# Altium PCB tach key H-4key.PcbDoc
Units mm, origin at the board's own origin, x right, y up, seen from the top; angles counter-clockwise.
Board outline 264.23 x 97.21 mm, 2 copper layers (Top Layer, Bottom Layer); 83 components, 54 nets, 236 pads, 0 vias.
Unrouted connection lines stored in the file: 8.
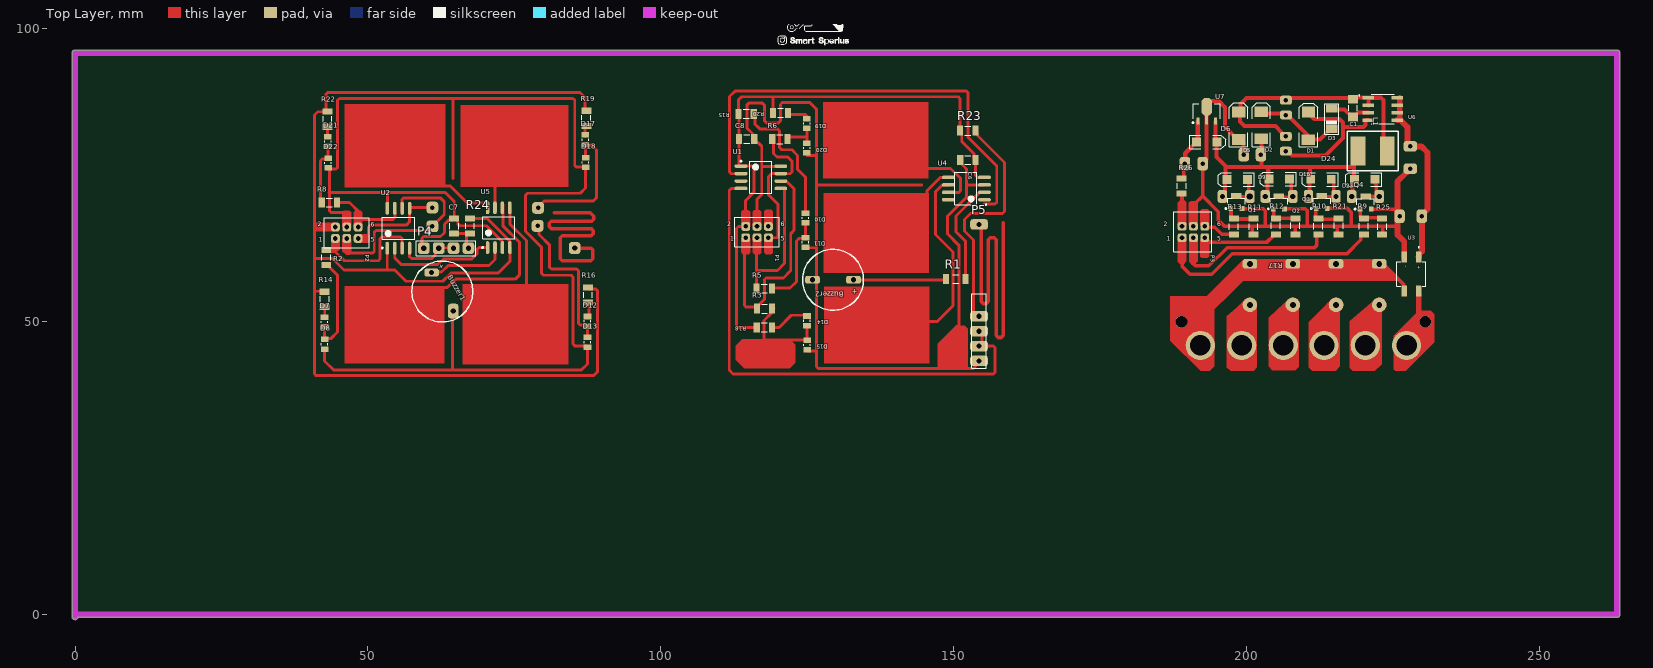
[diagram p0: Top Layer view]
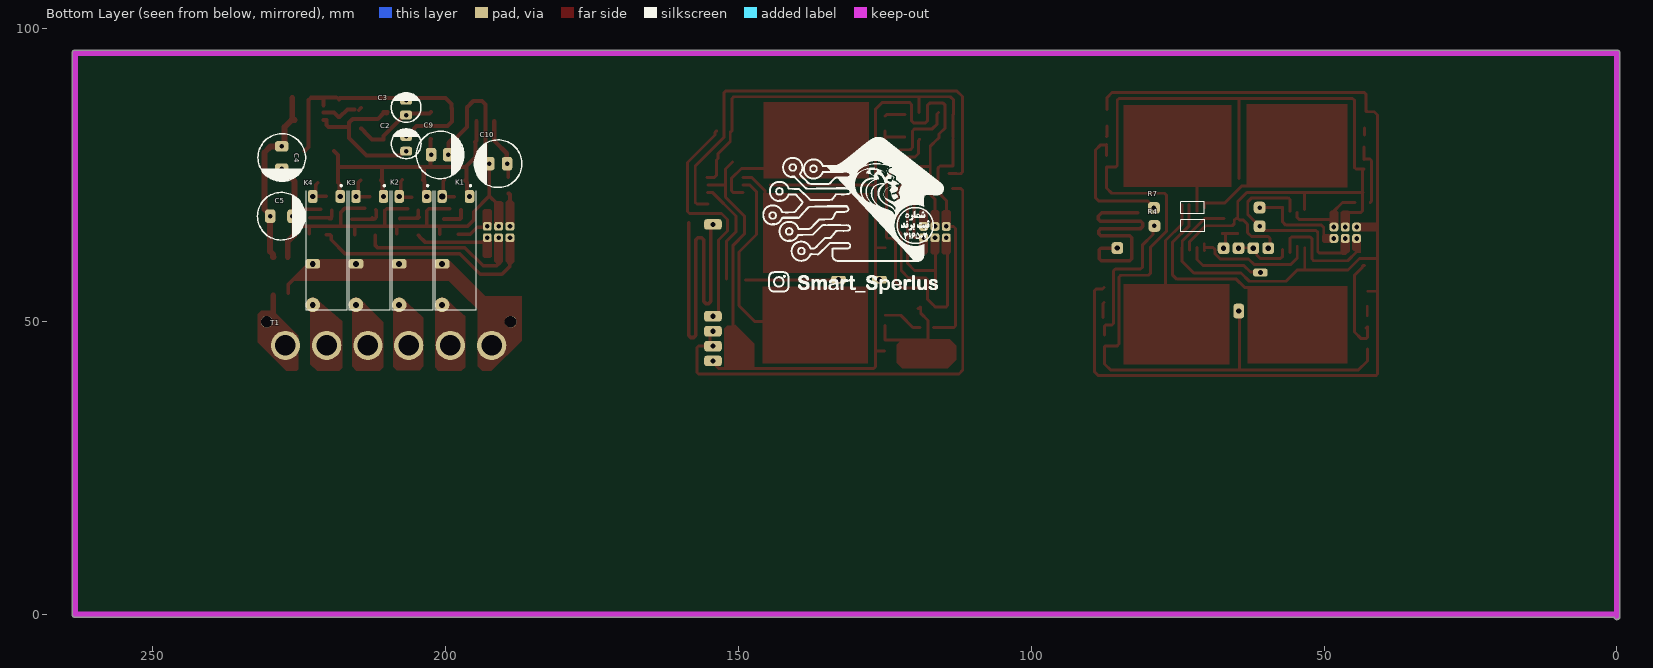
[diagram p1: Bottom Layer view, seen from below]
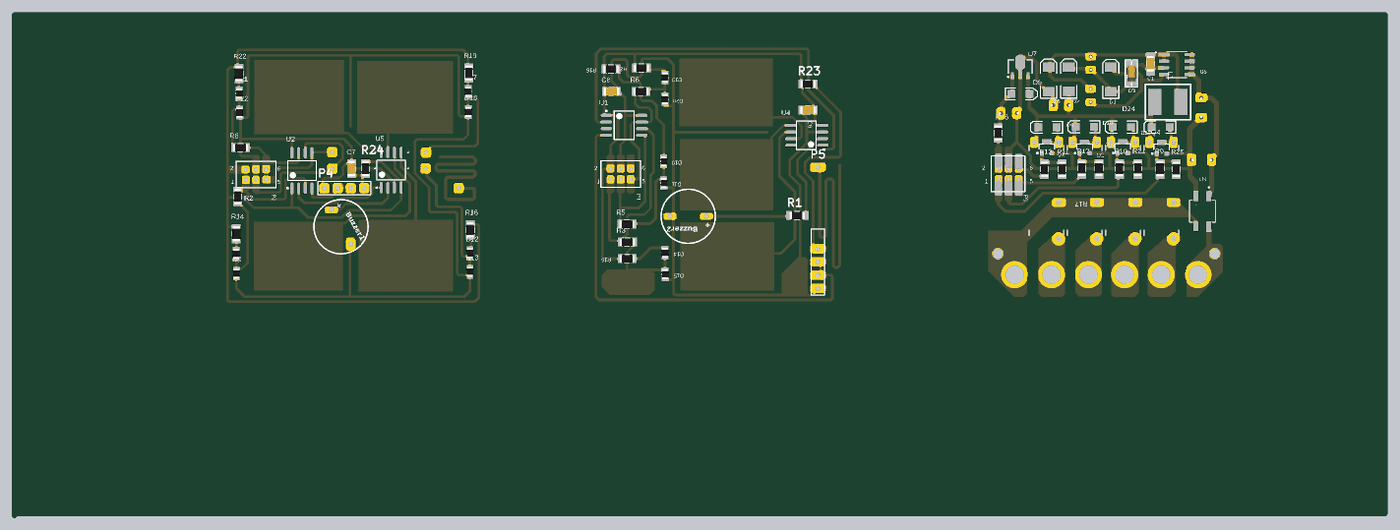
[diagram p2: 3D render of the assembled board from above, using the file's embedded part models]
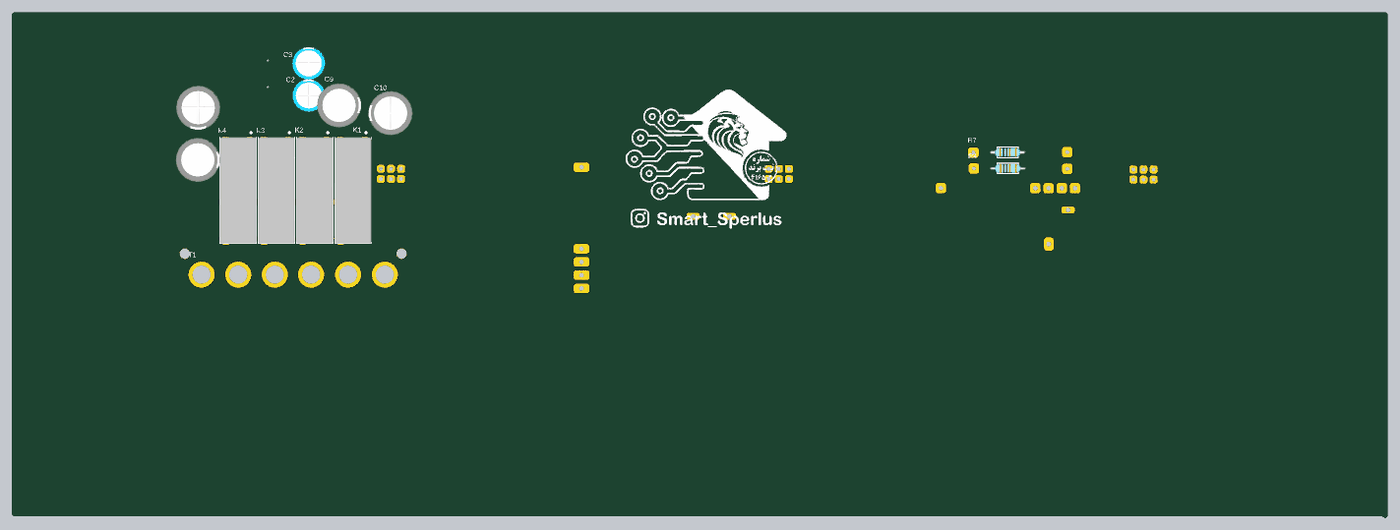
[diagram p3: 3D render of the assembled board from below, using the file's embedded part models]

## Layer stack, top to bottom
Top Solder: solder mask 0.0102, Solder Resist, Dk 3.5
Top Layer: signal copper 0.0356
Dielectric 1: dielectric 0.32, FR-4, Dk 4.8
Bottom Layer: signal copper 0.0356
Bottom Solder: solder mask 0.0102, Solder Resist, Dk 3.5

## Board outline
-0.5,-0.381 -0.5,95.825 cw(c0,95.825) 0,96.325 263.225,96.325 cw(c263.225,95.825) 263.725,95.825 263.725,0 cw(c263.225,0) 263.225,-0.5 0.486,-0.5 cw(c0,-0.381)

## Design rules (kind name [scope] priority, off if disabled: settings)
Clearance Clearance_1 [InPolygon] p1: gap=0.8 ignorepadtopadclearanceinfootprint=FALSE
Clearance [All] p2: gap=0.254 ignorepadtopadclearanceinfootprint=FALSE except(0: Arc-Hole Track-Hole SMDPad-Hole THPad-Hole Via-Hole Fill-Hole Poly-Hole Region-Hole Text-Hole)
PolygonConnect [All] p1: connectstyle=Relief reliefconductorwidth=0.254 reliefentries=4 polygonreliefangle="90 Angle" airgapwidth=0.254
RoomDefinition "tach key H-4key" [InComponentClass('tach key H-4key')] p1: confinementstyle=ConfineIn formatcopy=TRUE lockcomponents=FALSE outline 144.907,-4.953 247.904,-4.953 247.904,23.114 144.907,23.114
RoutingLayers [All] p1: top layer_v5=FALSE bottom layer_v5=TRUE
RoutingVias [All] p1: holewidth=0.711 width=2.5 viastyle="Through Hole" minholewidth=0.711 minwidth=1.27 maxholewidth=0.711 maxwidth=2
SolderMaskExpansion [All] p1: expansion=0.102 istentingtop=FALSE
SupplyNets "Schematic Supply Nets_2" [InNet('GND')] p1: voltage=0.000
SupplyNets "Schematic Supply Nets_1" [InNet('+12v')] p2: voltage=0.000
SupplyNets "Schematic Supply Nets" [InNet('vcc')] p3: voltage=0.000
Width [All] p1: maxlimit=3 minlimit=0.5 preferedwidth=1
29 further rules are at their usual default settings.

## Classes and differential pairs
component class "tach key H-4key": Buzzer1 Buzzer2 C1 C2 C3 C4 C5 C6 C7 C8 C9 C10 D1 D2 D3 D5 D6 D7 D8 D9 D10 D11 D12 D13 D14 D15 D16 D17 D18 D19 D20 D21 D22 D23 D24 J5 J8 JP? K1 K2 K3 K4 L1 P1 P2 P3 P4 P5 P7 Q1 Q2 Q3 Q4 R4 R7 R9 R11 R14 R17 R19 R20 R24 R26 T1 U1 U2 U3 U4 U5 U6 U7 U17

## Components (designator, comment, footprint, x,y, rotation, side; value= is the part's Value field where it differs from the comment)
Buzzer1 "Buzzer" BUZZER#1 62.7,55.125 r300 top
Buzzer2 "Buzzer" BUZZER#2 129.4,57.125 r180 top
C1 "=Value" "CAP 1206"#1 218.175,86.425 r90 top
C2 "=Value" ELEC-CAP-RAD10-20 206.7,80.35 r270 bottom
C3 "=Value" ELEC-CAP-RAD10-20 206.725,86.525 r270 bottom
C4 "=Value" ELEC-CAP-RAD15-30#1 227.95,78 r90 bottom
C5 "=Value" ELEC-CAP-RAD15-30#1 228.025,67.975 r0 bottom
C6 "=Value" "CAP 1206"#2 152.4,77.575 r0 top
C7 "=Value" "CAP 1206"#2 64.725,66.325 r270 top
C8 "=Value" "CAP 1206"#2 114.625,81.15 r0 top
C9 "=Value" ELEC-CAP-RAD15-30#2 200.9,78.45 r0 bottom
C10 "=Value" ELEC-CAP-RAD15-30#3 191,76.95 r180 bottom
D1 "D Schottky" SMB#1 210.575,83.4 r90 top
D2 "D Schottky" SMB#2 202.5,83.425 r90 top
D3 "Zener Diode" DO-35 214.552,87.115 r270 top
D5 "D Schottky" SMB#3 198.625,83.4 r90 top
D6 "D Tunnel1" 3.2X1.6X1.1 193.2,80.65 r0 top
D7 "MODEL" "RES 0805 (2012X06L)" 42.575,49.916 r270 top
D8 "MODEL" "RES 0805 (2012X06L)" 42.6,46.1 r270 top
D9 "D Tunnel1" 3.2X1.6X1.1 198.4,74.25 r180 top
D10 "MODEL" "RES 0805 (2012X06L)" 124.7,67.675 r270 top
D11 "MODEL" "RES 0805 (2012X06L)" 124.7,63.5 r270 top
D12 "MODEL" "RES 0805 (2012X06L)" 87.475,50.025 r270 top
D13 "MODEL" "RES 0805 (2012X06L)" 87.475,46.45 r270 top
D14 "MODEL" "RES 0805 (2012X06L)" 124.95,50.1 r270 top
D15 "MODEL" "RES 0805 (2012X06L)" 124.975,45.975 r270 top
D16 "D Tunnel1" 3.2X1.6X1.1 205.575,74.325 r180 top
D17 "MODEL" "RES 0805 (2012X06L)" 87.125,81.025 r270 top
D18 "MODEL" "RES 0805 (2012X06L)" 87.175,77.15 r270 top
D19 "MODEL" "RES 0805 (2012X06L)" 124.925,83.8 r270 top
D20 "MODEL" "RES 0805 (2012X06L)" 124.925,79.625 r270 top
D21 "MODEL" "RES 0805 (2012X06L)" 43.15,80.725 r270 top
D22 "MODEL" "RES 0805 (2012X06L)" 43.2,77.05 r270 top
D23 "D Tunnel1" 3.2X1.6X1.1 212.725,74.275 r180 top
D24 "D Tunnel1" 3.2X1.6X1.1 220.175,74.275 r180 top
K1 "1-1721081-2" TE_1-1721081-2#1 198.225,62.1 r270 bottom
K2 "1-1721081-2" TE_1-1721081-2#2 205.55,62.1 r270 bottom
K3 "1-1721081-2" TE_1-1721081-2#2 212.925,62.1 r270 bottom
K4 "1-1721081-2" TE_1-1721081-2#2 220.3,62.1 r270 bottom
L1 "1mH" HS1101 221.525,79.1 r0 top
P1 "Header 3X2" HDR2X3 113.885,64 r0 top
P2 "Header 3X2" HDR2X3 43.835,63.885 r0 top
P3 "Header 3X2" HDR2X3 188.385,64.01 r0 top
P4 "Header 5" HDR1X5#1 59.525,62.525 r0 top
P5 "Header 5" HDR1X5#2 154.325,43.27 r90 top
Q1 "QNPN" SOT-23B_L 198.275,70.35 r90 top
Q2 "QNPN" SOT-23B_L 205.525,70.325 r90 top
Q3 "QNPN" SOT-23B_L 212.85,70.375 r90 top
Q4 "QNPN" SOT-23B_L 220.325,70.275 r90 top
R1 "10K" "RES 1206 (3216X08L)"#1 150.325,57.275 r0 top
R2 "10K" "RES 1206 (3216X08L)"#2 42.875,60.926 r90 top
R3 "10K" "RES 1206 (3216X08L)"#2 117.7,52.2 r180 top
R4 "10K" Res-(1/4)#1 72.425,66.35 r180 bottom
R5 "10K" "RES 1206 (3216X08L)"#2 117.655,55.625 r180 top
R6 "10K" "RES 1206 (3216X08L)"#2 120.33,81.125 r180 top
R7 "10K" Res-(1/4)#2 72.46,69.425 r180 bottom
R8 "10K" "RES 1206 (3216X08L)"#2 43.4,70.321 r0 top
R9 "10K" "RES 1206 (3216X08L)"#3 220.025,66.275 r270 top
R10 "10K" "RES 1206 (3216X08L)"#3 212.25,66.275 r270 top
R11 "10K" "RES 1206 (3216X08L)"#4 201.2,66.175 r270 top
R12 "10K" "RES 1206 (3216X08L)"#5 205,66.325 r270 top
R13 "10K" "RES 1206 (3216X08L)"#6 197.83,66.2 r270 top
R14 "10K" "RES 1206 (3216X08L)"#2 42.6,53.775 r90 top
R15 "10K" "RES 1206 (3216X08L)"#2 114.575,85.45 r180 top
R16 "10K" "RES 1206 (3216X08L)"#2 87.55,54.525 r90 top
R17 "10K" "RES 1206 (3216X08L)"#5 208.325,66.325 r270 top
R18 "10K" "RES 1206 (3216X08L)"#2 117.68,49 r180 top
R19 "10K" "RES 1206 (3216X08L)"#2 87.275,84.675 r90 top
R20 "10K" "RES 1206 (3216X08L)"#2 120.43,85.625 r180 top
R21 "10K" "RES 1206 (3216X08L)"#5 215.725,66.325 r270 top
R22 "10K" "RES 1206 (3216X08L)"#2 43.075,84.55 r90 top
R23 "10K" "RES 1206 (3216X08L)"#2 152.4,82.575 r180 top
R24 "10K" "RES 1206 (3216X08L)"#2 67.425,66.3 r90 top
R25 "10K" "RES 1206 (3216X08L)"#4 223.15,66.175 r270 top
R26 "10K" "RES 1206 (3216X08L)"#2 188.925,73.125 r90 top
T1 "Phoenix terminal" "phoenix terminal 6" 226.166,34.229 r180 bottom
U1 "ATtiny15L-1SC" 8S2_N#1 117.075,74.625 r0 top
U2 "ATtiny15L-1SC" 8S2_N#1 55.2,65.925 r90 top
U3 "MB6S" SOIC245P670X270-4N 228.15,58.1 r270 top
U4 "ATtiny15L-1SC" 8S2_N#2 152.075,72.7 r180 top
U5 "ATtiny15L-1SC" 8S2_N#1 72.32,66.025 r90 top
U6 "HT7A6312" SOIC127P599X175-8N 223.255,86.295 r0 top
U7 "LM1117MP-3.3" SOT89L 193.175,85.9 r90 top

## Footprints (in the part's own frame and the unit in brackets; to place one, negate y for a bottom-side part, rotate by r counter-clockwise, add the part's x,y. Pads: shape width x height; smd on the part's side, far side on the other; paste and mask are expansions set on the pad)
3.2X1.6X1.1 [mm] "SMT LED; 2 Flat Leads"
  rect 1.5x1.5 smd: 1(-1.75,0) 2(1.75,0)
  silkscreen extent -2.9,-1.15 3.27,1.15
8S2_N#1 [mm] "SOP, 8-Leads, Body 5.3x5.3mm, Pitch 1.27mm, IPC Medium Density"
  oval 2.2x0.6 smd: 1(-3.4,1.905) 2(-3.4,0.635) 3(-3.4,-0.635) 4(-3.4,-1.905) 5(3.4,-1.905) 6(3.4,-0.635) 7(3.4,0.635) 8(3.4,1.905)
  silkscreen extent -3.52,-2.75 1.9,2.88, body extent -2.73,-2.75 2.73,2.75, height 2.16
8S2_N#2 [mm] "SOP, 8-Leads, Body 5.3x5.3mm, Pitch 1.27mm, IPC Medium Density"
  oval 2.2x0.6 smd: 1(-3.175,1.905) 2(-3.175,0.635) 3(-3.175,-0.635) 4(-3.175,-1.905) 5(2.975,-1.905) 6(2.975,-0.635) 7(2.975,0.635) 8(2.975,1.905)
  silkscreen extent -3.52,-2.75 1.9,2.88, body extent -2.73,-2.75 2.73,2.75, height 2.16
BUZZER#1 [mm] "BUZZER"
  rrect50% 1.3x2.5 hole 0.9 rot 150: 1(-3.725,0.025)
  rrect50% 1.8x2.5 hole 0.9 rot 60: 2(3.825,-0.05)
  silkscreen extent -5.2,-5.2 5.2,5.2
BUZZER#2 [mm] "BUZZER"
  rrect50% 2.5x1.3 hole 0.9: 1(-3.5,0) 2(3.5,0)
  silkscreen extent -5.2,-5.2 5.2,5.2
"CAP 1206"#1 [mm]
  rect 1.5x1.7 smd: 1(-1.524,0) 2(1.524,0)
  silkscreen extent -0.47,-0.75 0.53,0.75, body extent -1.49,-0.77 1.55,0.75, height 0.75
"CAP 1206"#2 [mm]
  rect 1.05x1.7 smd: 1(-1.27,0) 2(1.326,0)
  silkscreen extent -0.47,-0.75 0.53,0.75, body extent -1.49,-0.77 1.55,0.75, height 0.75
DO-35 [mm]
  rect 1.397x2 smd: 1(0.765,-0.027) 2(4.265,-0.027)
  silkscreen extent -0.07,-1.2 5.15,1.15, body extent -0.17,-0.81 5.35,0.84, height 1.81
ELEC-CAP-RAD10-20 [mil]
  rrect50% 60x80 hole 30: 1(-50,0) 2(50,0)
  silkscreen extent -100,-100 100,100, body extent -124,-124 124,124, height 404
ELEC-CAP-RAD15-30#1 [mil]
  rrect50% 70x90 hole 30: 1(-75,0) 2(75,0)
  silkscreen extent -160,-160 160,160, body extent -167,-167 167,167, height 609
ELEC-CAP-RAD15-30#2 [mil]
  rrect50% 70x90 hole 30: 1(-54.13,-0.98) 2(61.02,-1.97)
  silkscreen extent -160,-160 160,160, body extent -167,-167 167,167, height 609
ELEC-CAP-RAD15-30#3 [mil]
  rrect50% 70x90 hole 30: 1(-59.06,0) 2(60.04,0)
  silkscreen extent -160,-160 160,160, body extent -167,-167 167,167, height 609
HDR1X5#1 [mm] "Connector; Header; 5 Position"
  rrect50% 2x2 hole 0.9: 1(0,0) 2(2.54,0) 3(5.08,0) 4(7.62,0) 5(25.755,0.025)
  silkscreen extent -1.27,-1.27 8.89,1.27
HDR1X5#2 [mm] "Connector; Header; 5 Position"
  rrect50% 1.8x3 hole 0.9: 1(0,0) 2(2.54,0) 3(5.08,0) 4(7.62,0) 5(23.3,0)
  silkscreen extent -1.27,-1.27 11.43,1.27
HDR2X3 [mm] "Connector; Header; 3x2 Position"
  rrect50% 1.5x1.5 hole 0.8: 1(0.6,0.3) 2(0.6,2.24) 3(2.54,0.3) 4(2.54,2.24) 5(4.48,0.3) 6(4.48,2.24)
  silkscreen extent -1.27,-1.27 6.35,3.81
HS1101 [mm] "HUMIDITY SENSOR"
  rect 2.5x5 smd: 1(2.5,0) 2(-2.5,0)
"phoenix terminal 6" [mm] "6 terminals"
  round 5 hole 3.5: 1(-1.143,11.684) 2(5.897,11.684) 3(12.937,11.684) 4(19.897,11.684) 5(26.997,11.684) 6(34.057,11.684)
"RES 0805 (2012X06L)" [mm] "Chip Resistor, 2-Leads, Body 2.0x1.3mm, IPC High Density _ (0.100 W)"
  rect 0.95x1.3 smd: 1(-0.838,0) 2(0.812,0)
  silkscreen extent -0.16,-0.55 0.14,0.55, body extent -1.03,-0.63 1,0.64, height 0.6
"RES 1206 (3216X08L)"#1 [mm] "Chip Resistor, 2-Leads, Body 3.2x1.6mm, IPC High Density _ (0.125 W)"
  rect 1.05x1.7 smd: 1(-1.625,0) 2(1.7,0)
  silkscreen extent -0.5,-0.75 0.5,0.75, body extent -1.52,-0.76 1.53,0.76, height 0.6
"RES 1206 (3216X08L)"#2 [mm] "Chip Resistor, 2-Leads, Body 3.2x1.6mm, IPC High Density _ (0.125 W)"
  rect 1.05x1.7 smd: 1(-1.295,0) 2(1.301,0)
  silkscreen extent -0.5,-0.75 0.5,0.75, body extent -1.52,-0.76 1.53,0.76, height 0.6
"RES 1206 (3216X08L)"#3 [mm] "Chip Resistor, 2-Leads, Body 3.2x1.6mm, IPC High Density _ (0.125 W)"
  rect 1.05x1.7 smd: 1(-1.325,0) 2(1.401,0)
  silkscreen extent -0.5,-0.75 0.5,0.75, body extent -1.52,-0.76 1.53,0.76, height 0.6
"RES 1206 (3216X08L)"#4 [mm] "Chip Resistor, 2-Leads, Body 3.2x1.6mm, IPC High Density _ (0.125 W)"
  rect 1.05x1.7 smd: 1(-1.425,0) 2(1.301,0)
  silkscreen extent -0.5,-0.75 0.5,0.75, body extent -1.52,-0.76 1.53,0.76, height 0.6
"RES 1206 (3216X08L)"#5 [mm] "Chip Resistor, 2-Leads, Body 3.2x1.6mm, IPC High Density _ (0.125 W)"
  rect 1.05x1.7 smd: 1(-1.275,0) 2(1.451,0)
  silkscreen extent -0.5,-0.75 0.5,0.75, body extent -1.52,-0.76 1.53,0.76, height 0.6
"RES 1206 (3216X08L)"#6 [mm] "Chip Resistor, 2-Leads, Body 3.2x1.6mm, IPC High Density _ (0.125 W)"
  rect 1.05x1.7 smd: 1(-1.4,0) 2(1.326,0)
  silkscreen extent -0.5,-0.75 0.5,0.75, body extent -1.52,-0.76 1.53,0.76, height 0.6
Res-(1/4)#1 [mm]
  rrect50% 2x2 hole 0.762: 1(-6.525,-0.025) 2(11.425,-0.1)
  silkscreen extent -2.03,-1.02 2.03,1.02, body extent -3.43,-0.92 3.43,0.91, height 2.92
Res-(1/4)#2 [mm]
  rrect50% 2x2 hole 0.762: 1(-6.575,-0.025) 2(11.46,0.025)
  silkscreen extent -2.03,-1.02 2.03,1.02, body extent -3.43,-0.92 3.43,0.91, height 2.92
SMB#1 [mm] "DO-214-AA/SMB; 2 C-Bend Leads; Body 5.3 x 3.6 mm, inc. leads (LxW)"
  rect 1.8x2.3 smd: 1(-2.35,0.025) 2(2.375,0)
  silkscreen extent -3.6,-1.55 3.9,1.55
SMB#2 [mm] "DO-214-AA/SMB; 2 C-Bend Leads; Body 5.3 x 3.6 mm, inc. leads (LxW)"
  rect 1.8x2.3 smd: 1(-2.254,0) 2(2.371,0.025)
  silkscreen extent -3.58,-1.55 3.95,1.55
SMB#3 [mm] "DO-214-AA/SMB; 2 C-Bend Leads; Body 5.3 x 3.6 mm, inc. leads (LxW)"
  rect 1.8x2.3 smd: 1(-2.325,-0.05) 2(2.375,-0.025)
  silkscreen extent -3.57,-1.55 3.95,1.55
SOIC127P599X175-8N [mm]
  rrect25% 1.97x0.6 smd: 1(-2.47,1.905) 2(-2.47,0.635) 3(-2.47,-0.635) 4(-2.47,-1.905) 5(2.47,-1.905) 6(2.47,-0.635) 7(2.47,0.635) 8(2.47,1.905)
  silkscreen extent -4.14,-2.52 1.95,2.52
SOIC245P670X270-4N [mm]
  rrect23% 1.91x0.91 smd: 1(-2.9,1.225) 2(-2.9,-1.225) 3(2.9,-1.225) 4(2.9,1.225)
  silkscreen extent -4.68,-2.48 2.1,2.48
SOT89L [mm] "SOT89, 3-Leads, Body 4.5x2.4 mm, Pitch 1.5mm, Lead Span 4.1mm, IPC High Density"
  rect 1.2x0.5 smd: 1(-1.7,1.5) 3(-1.7,-1.5)
  rect 1.6x0.5 smd: 2(-1.5,0)
  oct 3x1.8 smd: 2(0.8,0)
  silkscreen extent -2.07,-2.3 1.3,2.42, body extent -1.3,-2.3 1.3,2.3, height 1.6
SOT-23B_L [mm] "SOT23, 3-Leads, Body 2.9x1.3mm, Pitch 0.95mm, Lead Span 2.4mm, IPC High Density"
  rect 0.85x0.8 smd: 1(-1.075,0.95) 2(-1.075,-0.95)
  rect 1x1.8 smd: 3(1.075,0)
  silkscreen extent -1.2,-1.5 0.7,1.92, body extent -0.7,-1.5 0.7,1.5, height 1.14
TE_1-1721081-2#1 [mm]
  rrect50% 2.2x1.6 hole 0.9 mask+0.102: 1(-9.25,2.35)
  rrect50% 2.2x1.6 hole 1.1 mask+0.102: 2(-9.25,-2.35)
  rrect50% 1.6x2.5 hole 1 mask+0.102: 3(2.25,-2.35)
  round 2.5 hole 1 mask+0.102: 4(9.25,-2.35)
  silkscreen extent -11.24,-3.5 10.2,3.5, body extent -10.2,-3.5 10.2,3.5, height 14.5
TE_1-1721081-2#2 [mm]
  rrect50% 2.2x1.6 hole 0.9 mask+0.102: 1(-9.25,2.35) 2(-9.25,-2.35)
  rrect50% 1.6x2.5 hole 1 mask+0.102: 3(2.25,-2.35)
  round 2.5 hole 1 mask+0.102: 4(9.25,-2.35)
  silkscreen extent -11.24,-3.5 10.2,3.5, body extent -10.2,-3.5 10.2,3.5, height 14.5

## Part data
C1 C6 C7 C8: library part Capacitor, "Capacitor"
C2 C3 C4 C5 C9 C10: library part "Capacitor Electrolytic", "Electrolytic Capacitor"
D1 D2 D5: "Schottky Diode", Code_JEDEC=DO-214-AA, LatestRevisionDate=17-Jul-2002, LatestRevisionNote="Re-released for DXP Platform.", PackageDescription="DO-214-AA/SMB; 2 C-Bend Leads; Body 5.3 x 3.6 mm, inc. leads (LxW)", PackageReference=SMB, Published=8-Jun-2000, Publisher="Altium Limited", Simulation ModelName=SKYDIODE, Simulation PortMap=(1:1),(2:2)
D6 D9 D16 D23 D24: "Tunnel Diode - RLC Model", LatestRevisionDate=17-Jul-2002, LatestRevisionNote="Re-released for DXP Platform.", PackageDescription="SM LED; 2 Flat Leads", PackageReference=3.2X1.6X1.1, PackageVersion=Feb-2002, Published=8-Jun-2000, Publisher="Altium Limited", Simulation ModelName=DTUNNEL1, Simulation PortMap=(1:1),(2:2)
D7 D8 D10 D11 D12 D13 D14 D15 D17 D18 D19 D20 D21 D22: library part "LED 5mm", "Typical LED", COLOR=RED
K1 K2 K3 K4: "General Purpose Relay SPST-NO (1 Form A) 12VDC Coil Through Hole", Package=None, Check_prices=https://www.snapeda.com/parts/1-1721081-2/TE+Connectivity+Potter+%2526+Brumfield+Relays/view-part/?ref=eda, MF="TE Connectivity", MP=1-1721081-2, SnapEDA_Link=https://www.snapeda.com/parts/1-1721081-2/TE+Connectivity+Potter+%2526+Brumfield+Relays/view-part/?ref=snap
L1: library part Inductor, "Inductor", Code_IEC=1005, Code_JEITA=0402, LatestRevisionDate=17-Jul-2002, LatestRevisionNote="Re-released for DXP Platform.", PackageReference=0402-A, Published=8-Jun-2000, Publisher="Altium Limited", Simulation ModelName=INDUCTOR, Simulation PortMap=(1:1),(2:2)
P1 P2 P3: "Header, 3-Pin, Dual row", LatestRevisionDate=17-Jul-2002, LatestRevisionNote="Re-released for DXP Platform.", Publisher="Altium Limited"
P4 P5: "Header, 5-Pin", LatestRevisionDate=17-Jul-2002, LatestRevisionNote="Re-released for DXP Platform.", Publisher="Altium Limited"
Q1 Q2 Q3 Q4: "NPN Bipolar Transistor", LatestRevisionDate=29-May-2009, LatestRevisionNote="IPC-7351 Footprint Added.", PackageDescription="3-Pin SOT-23 Package 0.95 mm Pitch, 2.4 mm Lead Span", PackageReference=SOT-23B, PackageVersion=Aug-1999, Published=8-Jun-2000, Publisher="Altium Limited", Simulation ModelName=QNPN, Simulation PortMap=(1:1),(2:2),(3:3)
R1 R2 R3 R4 R5 R6 R7 R8 R9 R10 R11 R12 R13 R14 R15 R16 R17 R18 R19 R20 R21 R22 R23 R24 R25 R26: library part Resistor, "Resistor", Power="1/4 W", Tolerance=5%, Simulation ModelName="Model Name", Simulation PortMap=(1:1),(2:2)
T1: library part "Phoenix terminal 6", "Terminal 6 Pin", ComponentLinkURL=www.picpars.com, Designer="Seyed Mohsen Ghasemain", E-mail=picpars@gmail.com
U1 U2 U4 U5: "8-Bit AVR Microcontroller with 1K Byte of Flash Memory", Supplier Part Number 1=ATTINY15L-1SC-ND, ComponentLink1Description=Datasheet, ComponentLink1URL=http://www.atmel.com/dyn/resources/prod_documents/doc1187.pdf, ComponentLink2Description="Atmel.com Home", ComponentLink2URL=http://www.atmel.com, DatasheetVersion=1187E-AVR-06/02, LatestRevisionDate=16-Oct-2006, LatestRevisionNote="IPC-7351 Footprint Added.", PackageDescription="8-Lead, 0.208\" Body, Plastic Small Outline Package (EIAJ)", PackageReference=8S2, PackageVersion="revF, Apr-2008", Published=17-Sep-2003, Publisher="Altium Limited", Supplier 1=Digi-Key, Supplier 2=Mouser, Supplier Part Number 2=556-ATTINY15L1SC
U3: "Bridge Rectifier Single Phase Standard 600V Surface Mount 4-SOIC", Package="BESOP-4 Surge Components", Digi-Key_Part_Number=MB6SCT-ND, Digi-Key_Purchase_URL=https://www.digikey.com.tr/product-detail/en/on-semiconductor/MB6S/MB6SCT-ND/965654?utm_source=snapeda&utm_medium=aggregator&utm_campaign=symbol, MF="ON Semiconductor", MP=MB6S, SnapEDA_Link=https://www.snapeda.com/parts/MB6S/ON%20Semiconductor/view-part/2774209/?ref=snap
U6: library part Component_1
U7: "800mA Low-Dropout Linear Regulator", DigiKeyPartNumber=LM1117MP-3.3CT-ND, Manufacturer="National Semiconductor", PackageTopMarking=XYTT*N05A, PowerWise=N, Code_IPC=SOT223-4, Code_JEDEC=TO-261-AA, ComponentLink1Description="LM1117 Datasheet", ComponentLink1URL=http://www.national.com/ds/LM/LM1117.pdf, ComponentLink2Description="LM1117 Web Page", ComponentLink2URL=http://www.national.com/pf/LM/LM1117.html, ComponentLink3Description="MP04A Package Page", ComponentLink3URL=http://www.national.com/packaging/folders/mp04a.html, CompType="LDO IC", DatasheetVersion=Apr-2006, PackageDescription="Molded SOT-223, 6.50 x 3.56 x 1.6mm Body, 4 Lead, 2.3mm Pitch", PackageReference=MP04A, PackageVersion="revB, Apr-2003", PartNumber=LM1117MP-3.3, PinCount=4, Published=4-Dec-2008, Publisher="Altium Limited", RoHS=O
Buzzer1 Buzzer2: ComponentLinkURL=www.picpars.com, Designer="Seyed Mohsen Ghasemain"
D3: MODEL=1N

## Free pads (board coordinates)
  round 2 hole 2: 156(188.875,49.95) 157(230.525,49.95)

## Nets (pads, with @x,y where several pads share a name; then routed paths per layer and width w, separated by ;. In a path a pad name is that pad's centre, name@x,y a point inside that pad or via, vN(x,y) a via of type N, cw(c..) or ccw(c..) an arc to the next point about the centre after c; other vN are vias at no path point)
+12v: C9.2 D2.1 D6.2 D9.2 D16.2 D23.2 D24.2 K1.1 K2.1 K3.1 K4.1 L1.2 U7.3 | length 59.1
  Top Layer w0.7: U7.3 194.675,80.925 D6.2 ; D6.2@194.9,80.65 194.9,78.075 196.6,76.375 203.7,76.375 ; K1.1 196.3,71.775 196.3,73.725 D9.2@196.675,74.1 ; D9.2@196.425,74.1 196.425,76.55 ; C9.2 202.525,78.425 202.525,76.425 ; D2.1 202.525,81.146 C9.2@202.525,78.9 ; K2.1 203.55,71.7 203.55,73.875 203.85,74.175 203.7,74.325 203.7,76.375 ; K3.1 210.775,71.55 210.775,73.9 211,74.125 210.825,74.3 210.825,76.375 ; K4.1 218.112,71.512 218.112,73.512 218.275,73.675 218.35,73.75 218.35,76.375 ; L1.2 218.35,78.425 218.35,76.375 ; 203.7,76.375 210.825,76.375 ; 210.825,76.375 218.35,76.375
biz1: Buzzer1.1 U5.2 | length 13.8
  Top Layer w0.5: Buzzer1.1 60.93,58.434 62.559,58.434 63.7,59.575 70.675,59.575 71.685,60.585 U5.2
biz2: R1.2 U4.2 | length 17.9
  Top Layer w0.5: R1.2 152.025,63.7 150.4,65.325 150.4,68.015 154.45,72.065 U4.2
data: U1.2 U4.1 | length 79.5
  Top Layer w0.5: U1.2@114.019,75.241 112.785,75.241 112.779,75.235 112.018,75.235 111.725,75.528 111.725,88.4 112.65,89.325 152.182,89.325 152.475,89.032 152.475,81.441 157.35,76.566 157.35,70.338 157.057,70.045 155.2,70.045
data2: U2.2 U5.1 | length 21
  Top Layer w0.5: U2.2@54.575,62.793 54.575,60.825 55.675,59.725 61.925,59.725 62.875,60.675 67.715,60.675 68.649,61.609 68.649,62.332 68.942,62.625 U5.1 ; U5.1@70.396,62.121 70.45,62.175 70.45,62.625 U5.1@70.45,63.208
faz: K1.3 K2.3 K3.3 K4.3 T1.6 U3.3 | length 47
  Top Layer w0.6: K4.3 223.088,59.412 223.763,59.412 226.875,56.3 U3.3@226.875,54.85
  Top Layer w1.6: T1.6 192.109,52.034 199.925,59.85 K1.3 K2.3 K3.3 K4.3
GND: Buzzer1.2 Buzzer2.2 C4.1 C5.1 C6.1 C7.1 C8.2 C9.1 C10.1 D5.1 D8.2 D11.2 D13.2 D15.2 D18.2 D20.2 D22.2 P1.4 P2.4 P3.4 P4.1 P5.1 Q1.2 Q2.2 Q3.2 Q4.2 R11.2 R17.2 R21.2 R25.2 U1.8 U2.8 U3.2 U4.3 U5.3 U7.2 | length 551.7
  Top Layer w0.5: D8.2 42.6,43.25 44.15,41.7 64.45,41.7 ; D22.2@43.15,76.038 D22.2@43.175,76.038 ; P2.4@46.225,66.148 46.225,68.357 45.932,68.65 43.693,68.65 43.4,68.943 43.4,71.993 43.368,72.025 43.4,72.025 ; U2.8@53.3,69.143 53.3,72.025 ; P4.1@59.245,62.6 59.245,64.207 59.538,64.5 62.4,64.5 63.075,65.175 63.075,66.6 63.795,67.32 64.45,67.32 C7.1 ; Buzzer1.2@64.45,52.025 64.45,41.7 ; 64.55,74.425 64.55,88.1 ; Buzzer1.2 Buzzer1.2@64.569,52.087 ; U5.3@72.974,62.214 72.936,62.252 72.936,63.639 70.225,66.35 65.675,66.35 65.325,66.7 65.325,67.32 65.05,67.595 C7.1 ; C8.2 115.726,81.375 115.726,81.999 114.675,83.05 114.675,86.924 115.026,87.275 117.324,87.275 117.675,86.924 117.675,84.276 118.026,83.925 120.095,83.925 120.446,84.276 120.446,87.07 120.801,87.425 125.4,87.425 126.57,86.255 126.57,78.324 ; C8.2@115.976,81.175 117.225,79.926 117.225,76.495 ; P1.4 116.425,70.875 117.225,71.675 117.225,76.495 ; U1.8@120.25,76.495 117.225,76.495 ; 124.925,78.324 126.57,78.324 ; D11.2@124.984,62.6 126.57,62.6 ; D15.2@125.027,44.938 125.667,44.938 125.668,44.937 126.57,44.937 ; 144.55,73.275 126.57,73.275 ; C6.1@150.98,77.25 152.175,76.055 152.175,73.325 ; P5.1@154.333,43.295 153.698,42.66 153.698,42.361 153.337,42 150.875,42 ; U4.3@155.155,73.325 152.175,73.325 ; D22.2@43.175,76.038 44.532,76.038 44.825,76.331 44.825,87.807 45.118,88.1 64.55,88.1 ; D22.2@43.175,76.038 43.4,75.813 43.4,72.025 ; 43.4,72.025 53.3,72.025 ; 53.3,72.025 63.175,72.025 64.725,70.475 C7.1 ; 64.45,41.7 86.425,41.7 87.475,42.75 D13.2 87.475,45.713 87.338,45.85 85.293,45.85 85,46.143 85,57.607 84.707,57.9 79.943,57.9 79.65,58.193 79.65,62.625 76.925,65.35 76.925,71.607 77.218,71.9 86.225,71.9 87.125,72.8 87.125,76.35 85.593,76.35 85.3,76.643 85.3,87.807 85.007,88.1 64.55,88.1 ; 126.57,44.937 126.57,62.174 126.57,62.6 ; 126.57,44.937 126.6,44.967 126.6,42.293 126.893,42 150.875,42 ; 126.57,62.6 126.57,73.275 ; 126.57,73.275 126.57,78.324 ; 150.875,42 150.875,63.025 148.925,64.975 148.925,67.975 152.175,71.225 152.175,73.325
  Top Layer w0.6: P3.4@191.075,66.275 191.075,70 192.5,71.425 ; C10.1 192.5,71.425 ; C10.1@192.5,77.047 193.078,77.625 C10.1@193.175,77.625 ; Q1.2 202.849,69.275 203.2,68.924 203.2,66.275 ; R11.2@201,64.875 201,66.275 ; Q2.2 210.049,69.25 210.4,68.899 210.4,66.275 ; R17.2@208.325,65.024 208.325,66.275 ; Q3.2 217.225,69.3 217.9,68.625 217.9,66.275 ; R21.2@215.45,64.816 215.45,66.275 ; Q4.2 225.75,69.2 ; R25.2@223.225,64.953 223.225,66.275 ; 225.75,66.275 223.225,66.275 ; C5.1@225.75,69 226.12,69 C5.1 ; 192.5,71.425 195.175,68.75 195.175,67.325 196.225,66.275 201,66.275 ; 201,66.275 203.2,66.275 ; 203.2,66.275 208.325,66.275 ; 208.325,66.275 210.4,66.275 ; 210.4,66.275 215.45,66.275 ; 215.45,66.275 217.9,66.275 ; 217.9,66.275 223.225,66.275
  Top Layer w0.7: C10.1@193.175,77.625 193.175,84.4 193.175,86.7 193.175,87.026 193.775,87.626 194.102,87.626 194.126,87.65 195.25,87.65 196.325,86.575 196.325,83.225 197.875,81.675 197.875,81.625 198.425,81.075 D5.1 198.925,81.075 199.475,80.525 C9.1@199.475,78.177
  Top Layer w1: U3.2 226.925,63.65 225.781,64.794 225.781,66.094 225.75,66.125 225.75,66.275 225.75,69 225.75,69.2 225.75,73.895 227.307,75.452 227.307,75.706 227.696,76.095 C4.1
NetBuzzer2_1: Buzzer2.1 R1.1 | length 15.9
  Top Layer w0.5: Buzzer2.1 R1.1@148.775,57.125
NetC1_1: C1.1 D3.1 U6.3 | length 6.7
  Top Layer w0.6: D3.1@214.407,86.467 D3.1@214.786,86.089
  Top Layer w0.7: 215.53,86.225 216.751,86.225 218.075,84.901 218.275,84.901 219.034,85.66 U6.3
NetC1_2: C1.2 C2.1 C3.1 D5.2 L1.1 U6.1 U6.2 | length 46.8
  Top Layer w0.7: C2.1@206.463,81.795 206.288,81.795 206.053,82.03 206.053,82.205 204.908,83.35 199.675,83.35 198.9,84.125 198.9,86.35 198.932,86.382 198.932,87.107 199.975,88.15 206.77,88.15 207.175,87.745 207.58,88.15 217.974,88.15 C1.2 ; C1.2@218.65,88.225 220.785,88.225 220.81,88.2 222.94,88.2 223.35,87.79 223.35,79.775 L1.1 ; U6.2 U6.1
NetC2_2: C2.2 D1.2 U6.4 | length 27.4
  Top Layer w0.7: C2.2@206.7,79.255 206.937,79.255 207.347,78.845 207.347,78.779 207.776,78.35 213.475,78.35 216.465,81.34 216.465,83.2 ; D1.2 209.913,85.775 210.028,85.513 210.45,85.7 211.55,84.6 215.825,84.6 216.429,83.996 ; 216.465,83.96 216.465,83.2 ; U6.4 220.31,84.39 220.31,83.551 219.958,83.2 216.465,83.2
NetC3_2: C3.2 D1.1 D2.2 D3.2 | length 15.1
  Top Layer w0.7: D2.2 202.746,85.525 206.455,85.525 C3.2 206.962,85.255 207.391,84.826 207.391,84.809 210.55,81.65 D1.1 212.505,81.05 213.825,82.37 213.825,82.451 214.341,82.967 D3.2@214.422,82.967
NetC4_2: C4.2 C5.2 U3.1 U6.5 U6.6 U6.7 U6.8 | length 30.8
  Top Layer w1: U6.5 226.26,84.39 227.464,83.186 227.464,80.294 227.853,79.904 229.842,79.904 230.875,78.872 230.875,69.174 C5.2@229.93,68.229 ; 226.145,84.707 226.145,85.66 U6.8@226.145,88.15 ; U3.1 229.42,61.045 229.42,61.455 229.93,61.965 C5.2
NetD7_1: D7.1 R14.1 | length 1.9
  Top Layer w0.5: D7.1@42.625,51.047 R14.1@42.625,52.08 ; R14.1@42.625,52.08 42.625,52.537 R14.1@42.625,52.08
NetD9_1: D9.1 K1.2 Q1.3 | length 4.8
  Top Layer w0.6: Q1.3@198.465,71.305 K1.2@200.35,71.305 ; D9.1@200.175,74.1 200.35,73.925 200.35,71.575 K1.2
NetD10_1: D10.1 R15.1 | length 23.2
  Top Layer w0.5: R15.1@115.82,85.7 116.095,85.425 116.095,83.68 116.875,82.9 119.899,82.9 120.25,82.549 120.25,79.7 120.625,79.325 122.375,79.325 123.35,78.35 123.35,76 124.7,74.65 D10.1@124.7,68.951
NetD12_1: D12.1 R16.1 | length 2.6
  Top Layer w0.5: R16.1 87.7,53.08 D12.1@87.7,50.702
NetD14_1: D14.1 R18.1 | length 6.7
  Top Layer w0.5: R18.1 120.2,49 122.275,51.075 D14.1@124.852,51.075
NetD16_1: D16.1 K2.2 Q2.3 | length 5.3
  Top Layer w0.6: Q2.3@205.713,71.237 207.787,71.237 K2.2 207.65,71.6 207.65,73.875 D16.1@207.35,74.175
NetD17_1: D17.1 R19.1 | length 1.8
  Top Layer w0.5: R19.1@87.075,83.38 87.075,81.638 D17.1@87.125,81.588
NetD19_1: D19.1 R20.1 | length 3.5
  Top Layer w0.5: R20.1@121.509,85.32 124.7,85.32 D19.1@124.925,85.095
NetD21_1: D21.1 R22.1 | length 1.2
  Top Layer w0.5: D21.1@43.1,81.817 R22.1@43.1,83.03
NetD23_1: D23.1 K3.2 Q3.3 | length 5.2
  Top Layer w0.6: Q3.3@212.95,71.325 212.963,71.338 215.263,71.338 K3.2 ; D23.1@214.5,74.125 214.925,73.7 214.925,71.911 K3.2@215.275,71.561
NetD24_1: D24.1 K4.2 Q4.3 | length 5
  Top Layer w0.6: Q4.3 K4.2 222.65,71.668 222.174,72.143 222.174,73.276 D24.1@221.775,73.675
NetP3_1: P3.1 R9.2 | length 40
  Top Layer w0.6: P3.1 188.985,59.44 190.35,58.075 194.05,58.075 197.55,61.575 217.15,61.575 219.513,63.938 219.513,64.649 219.662,64.798 R9.2@220.373,64.798
NetP3_3: P3.3 R10.2 | length 28.8
  Top Layer w0.6: P3.3 190.925,59.851 191.276,59.5 193.575,59.5 196.7,62.625 211.599,62.625 211.95,62.976 R10.2@211.95,64.722
NetP3_5: P3.5 R12.2 | length 12.7
  Top Layer w0.6: P3.5@192.84,63.935 P3.5@192.881,63.935 ; P3.5@192.906,64.31 193.641,63.575 203.5,63.575 204.45,64.525 204.45,64.649 204.551,64.75 R12.2@204.675,64.75
NetP3_6: P3.6 R13.2 | length 5.5
  Top Layer w0.6: P3.6 193.03,66.085 194.54,66.085 195.751,64.874 R13.2
nol: T1.1 U3.4 | length 9.4
  Top Layer w1: T1.1 227.309,46.781 229.026,48.499 229.026,49.327 229.025,49.329 229.025,50.571 229.4,50.946 U3.4@229.4,54.453
o1: P1.5 R6.2 U1.7 | length 25
  Top Layer w0.5: P1.5 119.777,64.3 120,64.523 120,70.025 118.375,71.65 118.375,74.725 118.894,75.244 U1.7@120.25,75.244 ; R6.2 119.225,80.929 119.225,78.7 119.85,78.075 121.675,78.075 122.375,77.375 122.375,75.525 122.075,75.225 121.381,75.225 121.365,75.241 U1.7@120.266,75.241
o2: P1.3 R5.2 U1.5 | length 27.6
  Top Layer w0.5: R5.2@116.325,55.54 116.325,64.2 P1.3 ; 116.325,58.432 116.618,58.725 119.9,58.725 121.125,59.95 121.125,72.674 121.079,72.72 U1.5
o3: P1.1 R3.2 U1.6 | length 40.9
  Top Layer w0.5: P1.1@114.275,64.3 114.275,52.743 114.568,52.45 R3.2@116.399,52.45 ; R3.2@116.484,52.584 116.484,52.61 116.674,52.8 116.7,52.8 117.7,53.8 117.7,57.157 117.993,57.45 120.925,57.45 122.175,58.7 122.175,65 122.7,65.525 122.7,72.725 121.502,73.923 121.153,73.923 121.14,73.936 U1.6@120.565,73.936
o11: P2.6 R8.2 U2.7 | length 14.2
  Top Layer w0.5: R8.2 46.854,70.321 48.515,68.66 48.515,67.425 ; P2.6 48.515,66.325 48.515,67.425 ; U2.7@54.589,68.614 54.584,68.609 54.584,68.435 54.589,68.43 54.589,67.789 54.225,67.425 48.515,67.425
o12: P2.5 R7.2 U2.5 | length 17.2
  Top Layer w0.5: P2.5 49.757,64.185 50.05,64.478 50.05,66.057 50.443,66.45 56.518,66.45 57.105,67.037 U2.5 ; U2.5@57.05,69.453 R7.2@61,69.453 ; U2.5@57.059,69.453 U2.5@57.086,69.426
o13: P2.3 R4.2 U2.6 | length 35.7
  Top Layer w0.5: P2.3@46.275,64.244 46.275,61.763 46.363,61.675 50.782,61.675 51.075,61.968 51.075,65.232 51.368,65.525 60.14,65.525 60.865,66.25 R4.2 63.025,68.275 63.025,70.45 62.35,71.125 56.118,71.125 55.825,70.832 U2.6@55.825,68.831
o14: P2.1 R2.2 U2.3 | length 20.5
  Top Layer w0.5: P2.1 44.435,61.89 45.95,60.375 51.782,60.375 52.075,60.668 52.075,64.132 52.368,64.425 55.542,64.425 55.835,64.132 U2.3@55.835,61.816
o21: D19.2 D20.1 R6.1 | length 4.9
  Top Layer w0.5: R6.1@121.577,81.525 124.925,81.525 ; D20.1@124.925,80.92 124.925,81.525 ; 124.925,82.499 124.925,81.525
o22: D10.2 D11.1 R5.1 | length 15.9
  Top Layer w0.5: R5.1@118.876,55.7 122.05,55.7 123.15,56.8 123.15,63.725 123.639,64.214 124.576,64.214 D11.1 ; D11.1@124.7,64.428 D10.2
o23: D14.2 D15.1 R3.1 | length 16.1
  Top Layer w0.5: R3.1@118.95,52.45 118.845,52.345 118.845,51.42 117.6,50.175 117.6,47.106 117.893,46.813 124.95,46.813 D14.2 ; R3.1 R3.1@119.29,52.2
o31: D21.2 D22.1 R8.1 | length 10.8
  Top Layer w0.5: R8.1 41.875,70.551 41.875,77.442 42.168,77.735 43.046,77.735 D22.1 ; D22.1@43.15,77.688 D21.2@43.15,79.799
o32: D17.2 D18.1 R7.1 | length 22.8
  Top Layer w0.5: R7.1 79.035,69.532 80.078,70.575 88.475,70.575 89.025,71.125 89.025,79.3 88.211,80.114 87.224,80.114 D17.2 ; D18.1@87.125,78.375 D17.2@87.125,79.938
o33: D12.2 D13.1 R4.1 | length 25.2
  Top Layer w0.5: R4.1@78.96,66.2 79.182,65.978 79.182,64.868 81.025,63.025 81.025,59.243 81.318,58.95 85.632,58.95 85.925,58.657 85.925,49.706 86.218,49.413 87.275,49.413 D12.2 ; D13.1@87.45,47.686 D12.2@87.45,49.213
o34: D7.2 D8.1 R2.1 | length 16.8
  Top Layer w0.5: D8.1@42.575,47.3 D7.2@42.575,48.86 ; D7.2 42.73,48.949 D7.2@42.819,48.86 ; D7.2@42.6,48.64 D7.2@42.754,48.794 ; D8.1@42.736,47.074 43.649,47.074 44.8,48.225 44.8,57.9 43.475,59.225 43.475,59.355 43.23,59.6 R2.1@43.1,59.6
o41: Q1.1 R11.1 R13.1 | length 4.5
  Top Layer w0.7: Q1.1@197.325,69.05 197.325,68.08 197.33,68.076 197.33,67.67 197.505,67.495 R13.1@198.035,67.495 ; R13.1@197.89,67.47 200.255,67.47
o42: Q2.1 R12.1 R17.1 | length 4.6
  Top Layer w0.6: R12.1@204.454,67.789 204.623,67.62 R12.1@205,67.62 ; Q2.1@204.625,68.975 204.625,67.995 R12.1@204.773,67.848 ; R12.1@205,67.611 207.759,67.611 R17.1@207.8,67.57
o43: Q3.1 R10.1 R21.1 | length 5.8
  Top Layer w0.6: R10.1@211.8,67.795 211.8,69 Q3.1@211.9,69.1 ; R10.1@212.025,67.57 R10.1@212.35,67.57 ; R10.1@212.475,67.745 212.2,67.47 212.475,67.47 R21.1@215.979,67.47
o44: Q4.1 R9.1 R25.1 | length 5.1
  Top Layer w0.6: Q4.1@219.375,69 219.382,68.993 R9.1@219.382,67.87 ; R9.1@219.525,67.545 R9.1@219.85,67.545 ; R9.1@219.625,67.725 R9.1@219.962,67.725 ; R9.1@219.85,67.725 R25.1@223.159,67.725
of1: K1.4 T1.5 | length 7.5
  Top Layer w2.5: T1.5 199.55,46.294 199.55,51.825 K1.4
of2: K2.4 T1.4 | length 7.6
  Top Layer w2.5: T1.4 206.269,51.219 K2.4
of3: K3.4 T1.3 | length 7.3
  Top Layer w2.5: T1.3@213.625,46.225 213.625,46.985 214.675,48.035 214.675,52.25 K3.4
of4: K4.4 T1.2 | length 7.3
  Top Layer w2.5: T1.2@220.919,46.331 220.832,46.418 220.832,46.983 221.8,47.952 221.8,52 K4.4
RF: P5.2 P5.3 U1.4 | length 86.5
  Top Layer w0.5: U1.4@113.45,72.685 113.434,72.701 112.785,72.701 112.769,72.685 111.968,72.685 111.675,72.392 111.675,41.7 112.325,41.05 156.782,41.05 157.075,41.343 157.075,45.532 156.782,45.825 155.825,45.825 P5.2@155.819,45.825 ; P5.2@154.825,45.835 P5.3@154.825,48.375
RF2: P4.2 P4.3 U2.4 | length 9.9
  Top Layer w0.5: U2.4@57.125,61.634 57.125,61.043 57.418,60.75 60.9,60.75 61.486,61.336 61.486,62.301 61.785,62.6 P4.3@64.325,62.6 ; U2.4@57.124,61.635 U2.4@57.124,62.302
VCC: C6.2 C7.2 C8.1 C10.2 D6.1 P1.2 P2.2 P3.2 P4.4 P5.4 R14.2 R15.2 R16.2 R18.2 R19.2 R20.2 R22.2 R23.1 R23.2 R24.1 R24.2 R26.1 R26.2 U1.1 U2.1 U4.4 U5.4 U7.1 | length 383.5
  Top Layer w0.5: R14.2@42.513,55.175 40.875,55.175 ; P2.2@44.375,66.25 40.875,66.25 ; U2.1 53.295,58.775 ; C7.2 R24.1@67.369,64.999 ; R24.1@66.852,64.724 66.852,62.818 P4.4 ; R24.2@67.059,67.6 70.375,67.6 74.206,63.769 74.206,62.644 U5.4 74.225,60.275 72.225,58.275 64.15,58.275 62.75,56.875 56.475,56.875 54.575,58.775 53.295,58.775 ; R19.2@87.075,86.225 87.075,88.2 86.175,89.1 43.118,89.1 42.825,88.807 42.825,85.851 42.575,85.835 41.385,85.76 40.875,85.25 40.875,66.25 ; R16.2 87.825,55.551 88.882,55.551 89.175,55.258 89.175,41.425 88.5,40.75 41.168,40.75 40.875,41.043 40.875,55.175 ; C8.1 113.355,76.576 113.401,76.53 U1.1 115.582,76.53 115.875,76.237 115.875,72.075 114.485,70.685 P1.2 113.265,66.24 112.9,65.875 112.9,49.293 113.193,49 R18.2 R18.2@116.669,49 ; C8.1@113.38,81.5 113.315,81.565 113.315,85.36 113.224,85.45 113.224,87.799 113.804,88.379 119.15,88.379 ; R20.2@119.15,85.683 119.15,88.379 ; R23.2@151.075,82.575 151.075,88.086 150.782,88.379 119.15,88.379 ; R23.2 151.374,82.3 151.374,80.726 153.451,78.649 153.451,77.85 C6.2 ; R23.1 153.97,82.3 153.97,81.855 158.675,77.15 158.675,68.8 158.325,68.45 152.875,68.45 151.825,67.4 151.825,65.475 153.4,63.9 153.4,51.525 154.036,50.889 P5.4 ; C6.2@153.75,77.575 153.75,74.948 154.074,74.624 155.336,74.624 U4.4@155.338,74.622 ; 40.875,55.175 40.875,60.75 ; 40.875,60.75 43.95,60.75 45.925,58.775 53.295,58.775 ; 40.875,60.75 40.875,66.25
  Top Layer w0.6: R26.2@189.25,74.65 C10.2@189.25,77.1
  Top Layer w0.7: P3.2 188.985,71.68 189.16,71.855 R26.1@189.25,71.855 ; C10.2 189.533,77.008 189.533,78.733 D6.1 191.675,80.875 U7.1
pads on no net: P1.6 P4.5 P5.5 U1.3 U4.5 U4.6 U4.7 U4.8 U5.5 U5.6 U5.7 U5.8
copper on no net: | length 278.3
  Top Layer w0.5: 54.275,79.325 56.525,79.325 62.7,73.15 64.045,73.15 66.951,70.244 70.369,70.244 70.369,69.433 ; 54.575,49.925 60.45,55.8 63.55,55.8 64.975,57.225 75.125,57.225 75.9,58 75.9,63.475 73.025,66.35 73.025,69.982 ; 71.7,68.828 71.7,77.36 73.515,79.175 75.602,79.175 ; 74.25,69.94 74.244,69.934 74.244,68.535 74.25,68.529 74.25,66.625 77.05,63.825 77.05,52.537 74.625,50.112 ; 136.7,81.725 141.65,76.775 142.275,76.15 149.475,76.15 151.15,74.475 151.15,72.653 151.15,72.343 150.857,72.05 149.193,72.05 ; 136.762,65.1 143.312,71.65 145.38,71.65 145.43,71.7 145.43,72.33 147.686,74.586 149.189,74.586 ; 136.875,48.55 137.15,48.275 138.882,50.007 147.207,50.007 149.9,52.7 149.9,61.875 146.9,64.875 146.9,72.175 148.041,73.316 149.191,73.316
  Top Layer w0.6: 81.822,68.55 87.975,68.55 88.526,67.999 88.526,67.501 88.175,67.15 81.326,67.15 80.975,66.799 80.975,66.226 81.326,65.875 88.125,65.875 88.476,65.524 88.476,65.026 88.1,64.65 83.151,64.65 82.8,64.299 82.8,60.726 83.151,60.375 87.999,60.375 88.35,60.726 88.35,62.25 88.075,62.525 85.575,62.525 ; 155.158,66.158 154.851,66.158 154.675,65.981 154.675,63.974 154.675,53.426 155.026,53.075 155.524,53.075 155.875,53.426 155.875,63.924 156.226,64.275 156.924,64.275 157.275,63.924 157.275,47.625 157.626,47.274 158.124,47.274 158.475,47.625 158.475,66.883

## Keep-outs
Keep-Out Layer:
  lines w1: 0,-0.381 0,95.825 263.225,95.825 263.225,0 0,0

## Other copper
Top Layer:
  rectangle: 66.125,42.625 84.225,56.425
  rectangle: 46,42.825 63.1,56.05
  rectangle: 65.8,73 84.254,86.975
  rectangle: 46.025,72.9 63.275,87.15
  region: 127.725,87.475 127.725,74.4 145.675,74.4 145.675,87.475
  region: 127.775,71.95 127.775,58.25 145.75,58.25 145.75,71.95
  region: 127.85,55.95 127.85,42.85 145.9,42.85 145.9,55.95
  region net GND: 190.165,66.425 190.165,70.3 190.44,70.575 191.44,70.575 191.665,70.35 191.665,66.425
  region net GND: 150.55,49.45 150.725,49.275 151.875,49.275 152.375,48.775 152.375,42.05 147.3,42.05 147.3,46.2
  region net GND: 115.687,66.315 115.687,68.765 115.937,69.015 116.887,69.015 117.162,68.74 117.162,66.165
  region net GND: 45.637,66.2 45.637,68.65 45.888,68.9 46.837,68.9 47.112,68.625 47.112,66.05
  region net NetP3_5: 193.631,63.935 193.631,61.145 193.356,60.87 192.356,60.87 192.131,61.095 192.131,63.935
  region net NetP3_3: 191.685,64.135 191.685,60.26 191.075,59.65 190.745,59.65 190.185,60.21 190.185,64.135
  region net NetP3_1: 189.745,64.135 189.745,60.26 189.285,59.8 188.655,59.8 188.245,60.21 188.245,64.135
  region net NetP3_6: 192.105,66.425 192.105,68.905 192.35,69.15 193.375,69.15 193.605,68.92 193.605,66.425
  region net VCC: 188.225,66.425 188.225,70.3 188.825,70.9 189.175,70.9 189.725,70.35 189.725,66.425
  region net o14: 45.173,64.11 45.173,62.373 44.502,61.703 43.697,61.702 43.697,64.26
  region net o12: 48.389,64.913 50.05,64.913 50.3,64.662 50.3,63.713 50.025,63.438 48.239,63.438
  region net o13: 47.113,64.11 47.113,61.66 46.862,61.41 46.265,61.41 45.638,62.037 45.638,64.26
  region net VCC: 44.36,65.387 41.163,65.387 40.875,65.675 40.875,66.725 41.012,66.863 44.51,66.863
  region net o11: 47.577,66.2 47.577,68.65 47.827,68.9 48.777,68.9 49.052,68.625 49.052,66.05
  region net o1: 119.102,64.225 119.102,61.775 118.852,61.525 117.902,61.525 117.627,61.8 117.627,64.375
  region net o2: 117.163,64.225 117.163,61.775 116.912,61.525 115.963,61.525 115.688,61.8 115.688,64.375
  region net o3: 115.223,64.225 115.223,61.775 114.972,61.525 114.022,61.525 113.747,61.8 113.747,64.375
  region net VCC: 113.747,66.315 113.747,68.765 113.997,69.015 114.947,69.015 115.222,68.74 115.222,66.165
  region: 117.625,66.375 117.625,68.825 117.875,69.075 118.825,69.075 119.1,68.8 119.1,66.225
  region net faz: 199.325,60.425 190.45,51.55 192.212,49.787 199.4,56.975 222.275,56.975 226.025,56.975 226.025,57.475 223.05,60.45 222.4,60.45
  region net faz: 186.995,54.35 186.995,46.755 192.155,41.595 193.726,41.595 194.475,42.344 194.475,53.825 193.95,54.35
  region net of3: 210.617,49.917 210.617,42.23 211.252,41.595 215.189,41.595 215.951,42.357 215.951,53.475 214.175,53.475
  region net of4: 219.761,41.595 219.888,41.722 219.761,41.595 218.11,41.595 217.602,42.103 217.602,50.053 221.282,53.225 223.063,53.225 223.063,42.738 221.92,41.595 218.745,41.595
  region net nol: 227.195,41.595 232.08,46.48 232.08,51.22 231.475,51.825 229.375,51.825 225.095,47.545 225.095,41.849 225.349,41.595
  region net of1: 196.647,50.903 196.647,42.23 197.282,41.595 201.219,41.595 201.775,42.151 201.775,52.975 198.967,52.975
  region net of2: 203.747,50.672 203.747,42.355 204.382,41.72 208.319,41.72 208.875,42.276 208.875,53.1 206.466,53.1
  region net o23: 122.015,46.96 113.86,46.96 112.8,45.9 112.8,43.5 114.275,42.025 122.025,42.025 122.975,42.975 122.975,46
  pour cut-out: 147.523,73.6 126.316,73.6 126.316,89.289 147.384,89.289
  pour cut-out: 147.666,57.475 126.443,57.475 126.443,72.825 147.53,72.825
  pour cut-out: 147.741,40.775 126.443,40.775 126.443,56.725 147.6,56.725

## Silkscreen, mask and mechanical layers (free items; w line width, h text height)
Top Overlay:
  drawing of 48 lines, arcs and shapes, not listed
Bottom Overlay:
  drawing of 44 lines, arcs and shapes, not listed
Top Paste:
  region: 191.688,66.462 191.688,68.913 191.463,69.138 190.413,69.138 190.213,68.938 190.213,66.487
  region: 193.613,66.237 193.613,68.888 193.387,69.113 192.337,69.113 192.137,68.913 192.137,66.262
  region: 188.241,63.865 188.241,61.306 188.466,61.081 189.516,61.081 189.716,61.281 189.716,63.84
  region: 190.179,63.947 190.179,61.294 190.404,61.069 191.454,61.069 191.654,61.269 191.654,63.922
  region: 192.129,63.948 192.129,61.294 192.354,61.069 193.404,61.069 193.604,61.269 193.604,63.923
  region: 189.738,66.537 189.738,68.963 189.513,69.188 188.463,69.188 188.263,68.988 188.263,66.562
Mechanical 2:
  lines w0.2: 40.125,40.17 40.125,89.85 ; 40.125,89.875 89.9,89.875 89.9,40.12 40.177,40.084 ; 186.36,84.11 191.5,89.25 ; 110.16,40.148 110.16,89.95 159.9,89.95 159.9,40.184 110.16,40.148
  lines w0.254: 186.36,84.11 186.36,46.665 192.192,40.833 227.583,40.833 232.715,45.965 232.715,84.04 ; 191.5,89.25 227.5,89.25 232.713,84.038

## Text inside footprints (layer, text, board x,y; h text height)
Buzzer1: Top Overlay "+" at 61.669,59.45 h1.52 r300
Buzzer2: Top Overlay "+" at 133.661,55.855 h1.52 r180
P1: Top Overlay "1" at 111.853,63.492 h1.27; Top Overlay "2" at 111.345,66.032 h1.27; Top Overlay "5" at 120.489,63.492 h1.27; Top Overlay "6" at 120.489,66.032 h1.27
P2: Top Overlay "6" at 50.439,65.917 h1.27; Top Overlay "5" at 50.439,63.377 h1.27; Top Overlay "2" at 41.436,66.013 h1.27; Top Overlay "1" at 41.611,63.388 h1.27
P3: Top Overlay "6" at 194.989,66.042 h1.27; Top Overlay "5" at 194.989,63.502 h1.27; Top Overlay "2" at 185.845,66.042 h1.27; Top Overlay "1" at 186.353,63.502 h1.27
U3: Top Overlay "+" at 229.04,59.499 h0.81 r270; Top Overlay "-" at 226.75,59.5 h0.81 r270